# Altium PCB SPTSquidBoardRev0.PcbDoc (part 2 of 2)
Units mil, origin at the board's own origin, x right, y up, seen from the top; angles counter-clockwise.
Board outline 7119.46 x 1780.03 mil, 6 copper layers (Top Layer, Internal Plane 1, Mid-Layer 1, Mid-Layer 2, Internal Plane 2, Bottom Layer), stack 48.451 mil thick; 66 components, 109 nets, 344 pads, 93 vias.
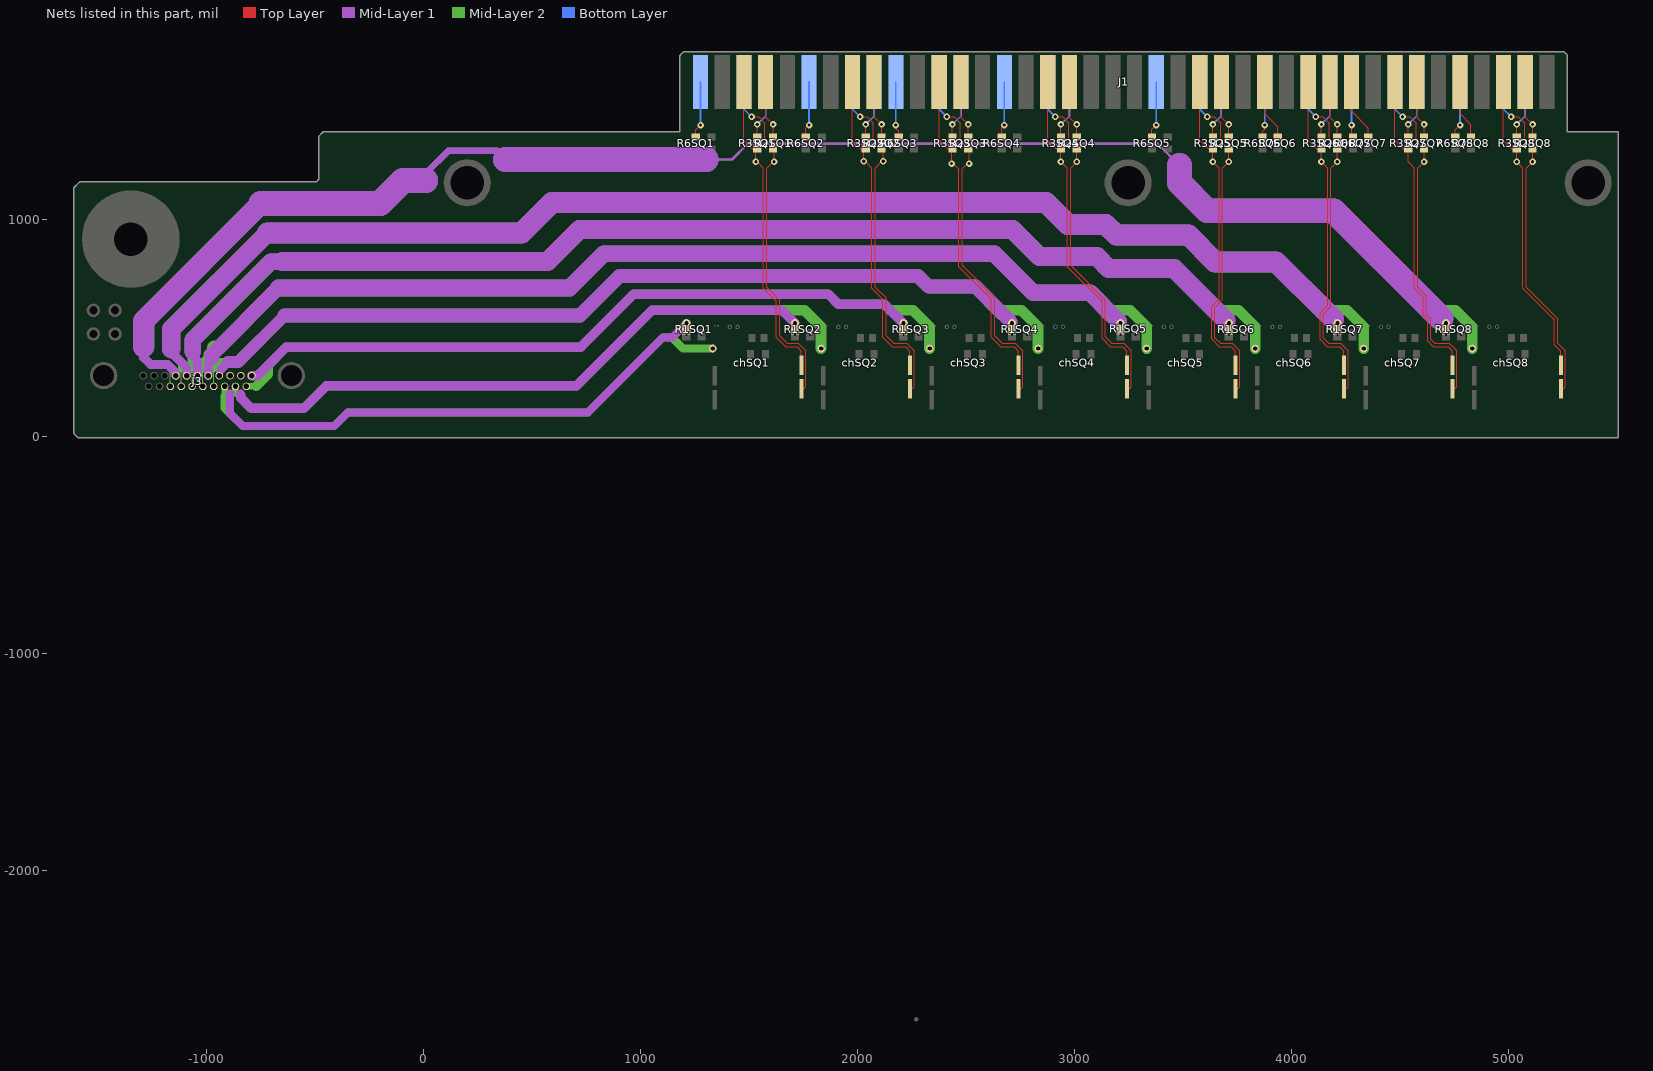
[diagram p6: the nets of this part, all layers, seen from the top]

## Via types
v1: diameter 30, hole 15, Top Layer to Bottom Layer, 93 vias

## Nets (pads, with @x,y where several pads share a name; then routed paths per layer and width w, separated by ;. In a path a pad name is that pad's centre, name@x,y a point inside that pad or via, vN(x,y) a via of type N, cw(c..) or ccw(c..) an arc to the next point about the centre after c; other vN are vias at no path point) (continued)
NULL_N6: J1.14B R7SQ6.1 | length 278.7
  Top Layer w5: J1.14B@3875,1635 3875,1488.93 3934.72,1429.21 R7SQ6.1@3934.72,1381
NULL_N7: J1.10B R7SQ7.1 | length 285.7
  Top Layer w5: J1.10B@4275,1635 4275,1499.02 4351.55,1422.47 R7SQ7.1@4351.55,1381
NULL_N8: J1.5B R7SQ8.1 | length 274.7
  Top Layer w5: J1.5B@4775,1635 4775,1488.26 4824.94,1438.31 R7SQ8.1@4824.94,1381
NULL_P1: J1.40A R6SQ1.1 | length 263.4
  Top Layer w5: R6SQ1.1@1253.22,1381 1253.22,1414.22 v1(1275,1436) v1@1275.35,1436
  Bottom Layer w8: v1(1275,1436) J1.40A@1275,1635
NULL_P2: J1.35A R6SQ2.1 | length 260.7
  Top Layer w5: R6SQ2.1@1759.55,1381 1759.55,1420.55 v1(1775,1436) v1@1775.35,1436
  Bottom Layer w8: v1(1775,1436) J1.35A@1775,1635
NULL_P3: J1.31A R6SQ3.1 | length 259.5
  Top Layer w5: v1(2175,1436) 2175,1421.35 2188.2,1408.15 R6SQ3.1@2188.2,1381
  Bottom Layer w8: v1(2175,1436) J1.31A@2175,1635
NULL_P4: J1.26A R6SQ4.1 | length 259.2
  Top Layer w5: R6SQ4.1@2662.49,1381 2662.49,1423.49 v1(2675,1436)
  Bottom Layer w8: v1(2675,1436) J1.26A@2675,1635
NULL_P5: J1.19A R6SQ5.1 | length 262.3
  Top Layer w5: R6SQ5.1@3355.02,1381 3355.02,1416.02 v1(3375,1436)
  Bottom Layer w8: v1(3375,1436) J1.19A@3375,1635
NULL_P6: J1.14A R6SQ6.1 | length 258.2
  Top Layer w5: R6SQ6.1@3864.84,1381 3864.84,1407.47 3875,1417.63 v1(3875,1436)
  Bottom Layer w8: v1(3875,1436) J1.14A@3875,1635
NULL_P7: J1.10A R6SQ7.1 | length 256.7
  Top Layer w5: v1(4275,1436) 4275,1387.48 R6SQ7.1@4281.48,1381
  Bottom Layer w8: v1(4275,1436) J1.10A@4275,1635
NULL_P8: J1.5A R6SQ8.1 | length 263
  Top Layer w5: R6SQ8.1@4753.16,1381 4753.16,1414.16 v1(4775,1436)
  Bottom Layer w8: v1(4775,1436) J1.5A@4775,1635
SQ_IV_N1: J1.37A R3SQ1.1 | length 270.2
  Top Layer w5: R3SQ1.1@1536,1381 v1(1536,1439)
  Bottom Layer w8: v1(1536,1439) 1575,1478 J1.37A@1575,1635
SQ_IV_N2: J1.32A R3SQ2.1 | length 270.2
  Top Layer w5: R3SQ2.1@2036,1381 v1(2036,1439)
  Bottom Layer w8: v1(2036,1439) 2075,1478 J1.32A@2075,1635
SQ_IV_N3: J1.28A R3SQ3.1 | length 270.2
  Top Layer w5: R3SQ3.1@2436,1381 v1(2436,1439)
  Bottom Layer w8: v1(2436,1439) 2475,1478 J1.28A@2475,1635
SQ_IV_N4: J1.23A R3SQ4.1 | length 270.2
  Top Layer w5: R3SQ4.1@2936,1381 v1(2936,1439)
  Bottom Layer w8: v1(2936,1439) 2975,1478 J1.23A@2975,1635
SQ_IV_N5: J1.16A R3SQ5.1 | length 270.2
  Top Layer w5: R3SQ5.1@3636,1381 v1(3636,1439)
  Bottom Layer w8: v1(3636,1439) 3675,1478 J1.16A@3675,1635
SQ_IV_N6: J1.11A R3SQ6.1 | length 270.2
  Top Layer w5: R3SQ6.1@4136,1381 v1(4136,1439)
  Bottom Layer w8: v1(4136,1439) 4175,1478 J1.11A@4175,1635
SQ_IV_N7: J1.7A R3SQ7.1 | length 270.2
  Top Layer w5: R3SQ7.1@4536,1381 v1(4536,1439)
  Bottom Layer w8: v1(4536,1439) 4575,1478 J1.7A@4575,1635
SQ_IV_N8: J1.2A R3SQ8.1 | length 270.2
  Top Layer w5: R3SQ8.1@5036,1381 v1(5036,1439)
  Bottom Layer w8: v1(5036,1439) 5075,1478 J1.2A@5075,1635
SQ_IV_P1: J1.37B R2SQ1.2 | length 268.1
  Top Layer w5: J1.37B@1575,1635 1575,1473 v1(1609,1439) R2SQ1.2@1609,1381
SQ_IV_P2: J1.32B R2SQ2.2 | length 268.1
  Top Layer w5: J1.32B@2075,1635 2075,1473 v1(2109,1439) R2SQ2.2@2109,1381
SQ_IV_P3: J1.28B R2SQ3.2 | length 268.1
  Top Layer w5: J1.28B@2475,1635 2475,1473 v1(2509,1439) R2SQ3.2@2509,1381
SQ_IV_P4: J1.23B R2SQ4.2 | length 268.1
  Top Layer w5: J1.23B@2975,1635 2975,1473 v1(3009,1439) R2SQ4.2@3009,1381
SQ_IV_P5: J1.16B R2SQ5.2 | length 268.1
  Top Layer w5: J1.16B@3675,1635 3675,1473 v1(3709,1439) R2SQ5.2@3709,1381
SQ_IV_P6: J1.11B R2SQ6.2 | length 268.1
  Top Layer w5: J1.11B@4175,1635 4175,1473 v1(4209,1439) R2SQ6.2@4209,1381
SQ_IV_P7: J1.7B R2SQ7.2 | length 268.1
  Top Layer w5: J1.7B@4575,1635 4575,1473 v1(4609,1439) R2SQ7.2@4609,1381
SQ_IV_P8: J1.2B R2SQ8.2 | length 268.1
  Top Layer w5: J1.2B@5075,1635 5075,1473 v1(5109,1439) R2SQ8.2@5109,1381
SQ_OUT_N1: chSQ1.4 J1.38B R3SQ1.2 | length 1464.7
  Top Layer w5: J1.38B@1475,1635 1475,1366 1516,1325 R3SQ1.2@1536,1325 1530.23,1319.23 v1(1530.23,1266.76) 1536.24,1266.76 1565,1238 1565,683.21 1625,623.21 1625,458.79 1668.79,415 1719.79,415 1740,394.79 chSQ1.4@1740,330
SQ_OUT_N2: chSQ2.4 J1.33B R3SQ2.2 | length 1473.4
  Top Layer w5: J1.33B@1975,1635 1975,1366 2016,1325 R3SQ2.2@2036,1325 2027,1316 v1(2027,1269.63) 2033.37,1269.63 2065,1238 2065,683.21 2115,633.21 2115,458.79 2158.79,415 2219.79,415 2240,394.79 chSQ2.4@2240,330
SQ_OUT_N3: chSQ3.4 J1.29B R3SQ3.2 | length 1528.1
  Top Layer w5: J1.29B@2375,1635 2375,1366 2416,1325 R3SQ3.2@2436,1325 ; R3SQ3.2@2424.22,1313.22 R3SQ3.2@2436,1325 ; chSQ3.4@2740,330 2740,394.79 2719.79,415 2658.79,415 2614.74,459.05 2614.74,633.48 2465,783.21 2465,1233.19 2439.53,1258.66 v1(2431.94,1258.66) 2431.94,1320.94 R3SQ3.2@2436,1325
SQ_OUT_N4: chSQ4.4 J1.24B R3SQ4.2 | length 1500.7
  Top Layer w5: J1.24B@2875,1635 2875,1366 2916,1325 R3SQ4.2@2936,1325 v1(2936,1267) 2965,1238 2965,783.21 3125,623.21 3125,453.79 3163.79,415 3219.79,415 3240,394.79 chSQ4.4@3240,330
SQ_OUT_N5: chSQ5.4 J1.17B R3SQ5.2 | length 1445.7
  Top Layer w5: J1.17B@3575,1635 3575,1366 3616,1325 R3SQ5.2@3636,1325 v1(3636,1267) 3665,1238 3665,636.21 3630,601.21 3630,450.7 3665.7,415 3719.79,415 3740,394.79 chSQ5.4@3740,330
SQ_OUT_N6: chSQ6.4 J1.12B R3SQ6.2 | length 1446.9
  Top Layer w5: J1.12B@4075,1635 4075,1366 4116,1325 R3SQ6.2@4136,1325 v1(4136,1267) 4165,1238 4165,606.21 4130,571.21 4130,448.79 4163.79,415 4219.79,415 4240,394.79 chSQ6.4@4240,330
SQ_OUT_N7: chSQ7.4 J1.8B R3SQ7.2 | length 1465.9
  Top Layer w5: J1.8B@4475,1635 4475,1366 4516,1325 R3SQ7.2@4536,1325 4536,1267 4565,1238 4565,683.21 4605,643.21 4605,558.79 4625,538.79 4625,442.57 4652.57,415 4719.79,415 4740,394.79 chSQ7.4@4740,330
SQ_OUT_N8: chSQ8.4 J1.3B R3SQ8.2 | length 1426.5
  Top Layer w5: J1.3B@4975,1635 4975,1366 5016,1325 R3SQ8.2@5036,1325 v1(5036,1267) 5065,1238 5065,683.21 5210,538.21 5210,424.79 5240,394.79 chSQ8.4@5240,330
SQ_OUT_P1: chSQ1.3 J1.38A R2SQ1.1 | length 1627.3
  Top Layer w5: v1(1510,1474) 1543,1474 1572,1445 1572,1362 R2SQ1.1@1609,1325 1614.06,1319.94 v1(1614.06,1267.48) 1609.48,1267.48 1580,1238 1580,689.43 1640,629.43 1640,465 1675,430 1726,430 1760,396 1760,230 1750,220 chSQ1.3@1740,220
  Bottom Layer w8: J1.38A@1475,1635 1475,1509 v1(1510,1474)
SQ_OUT_P2: chSQ2.3 J1.33A R2SQ2.1 | length 1636.9
  Top Layer w5: v1(2010,1474) 2043,1474 2072,1445 2072,1362 R2SQ2.1@2109,1325 2117.22,1316.78 v1(2117.22,1268.75) 2110.75,1268.75 2080,1238 2080,689.43 2130,639.43 2130,465 2165,430 2226,430 2260,396 2260,230 2250,220 chSQ2.3@2240,220
  Bottom Layer w8: J1.33A@1975,1635 1975,1509 v1(2010,1474)
SQ_OUT_P3: chSQ3.3 J1.29A R2SQ3.1 | length 1692.5
  Top Layer w5: v1(2410,1474) 2443,1474 2472,1445 2472,1362 R2SQ3.1@2509,1325 ; R2SQ3.1@2520.98,1313.02 R2SQ3.1@2509,1325 ; chSQ3.3@2740,220 2750,220 2760,230 2760,396 2726,430 2665,430 2629.74,465.26 2629.74,639.69 2480,789.43 2480,1235.48 2503.18,1258.66 v1(2512.16,1258.66) 2512.16,1321.84 R2SQ3.1@2509,1325
  Bottom Layer w8: J1.29A@2375,1635 2375,1509 v1(2410,1474)
SQ_OUT_P4: chSQ4.3 J1.24A R2SQ4.1 | length 1664.8
  Top Layer w5: v1(2910,1474) 2943,1474 2972,1445 2972,1362 R2SQ4.1@3009,1325 v1(3009,1267) 2980,1238 2980,789.43 3140,629.43 3140,460 3170,430 3226,430 3260,396 3260,230 3250,220 chSQ4.3@3240,220
  Bottom Layer w8: J1.24A@2875,1635 2875,1509 v1(2910,1474)
SQ_OUT_P5: chSQ5.3 J1.17A R2SQ5.1 | length 1609.8
  Top Layer w5: v1(3610,1474) 3643,1474 3672,1445 3672,1362 R2SQ5.1@3709,1325 v1(3709,1267) 3680,1238 3680,630 3645,595 3645,456.91 3671.91,430 3726,430 3760,396 3760,230 3750,220 chSQ5.3@3740,220
  Bottom Layer w8: J1.17A@3575,1635 3575,1509 v1(3610,1474)
SQ_OUT_P6: chSQ6.3 J1.12A R2SQ6.1 | length 1610.9
  Top Layer w5: v1(4110,1474) 4143,1474 4172,1445 4172,1362 R2SQ6.1@4209,1325 v1(4209,1267) 4180,1238 4180,600 4145,565 4145,455 4170,430 4226,430 4260,396 4260,230 4250,220 chSQ6.3@4240,220
  Bottom Layer w8: J1.12A@4075,1635 4075,1509 v1(4110,1474)
SQ_OUT_P7: chSQ7.3 J1.8A R2SQ7.1 | length 1629.9
  Top Layer w5: v1(4510,1474) 4543,1474 4572,1445 4572,1362 R2SQ7.1@4609,1325 v1(4609,1267) 4580,1238 4580,689.43 4620,649.43 4620,565 4640,545 4640,448.79 4658.79,430 4726,430 4760,396 4760,230 4750,220 chSQ7.3@4740,220
  Bottom Layer w8: J1.8A@4475,1635 4475,1509 v1(4510,1474)
SQ_OUT_P8: chSQ8.3 J1.3A R2SQ8.1 | length 1590.5
  Top Layer w5: v1(5010,1474) 5043,1474 5072,1445 5072,1362 R2SQ8.1@5109,1325 v1(5109,1267) 5080,1238 5080,689.43 5225,544.43 5225,431 5260,396 5260,230 5250,220 chSQ8.3@5240,220
  Bottom Layer w8: J1.3A@4975,1635 4975,1509 v1(5010,1474)
WIRE_N1: J3.9 R1SQ1.2B | length 2412.5
  Mid-Layer 1 w37: -893.13,190.25 -893.13,107.65 -834.55,49.06 -413.27,49.06 -350.78,111.56 755.39,111.56 1101.05,457.21 1144.94,457.21 R1SQ1.2B@1209.92,522.19
  Mid-Layer 1 w40: -893.13,190.25 -893.13,196.9
WIRE_N2: J3.10 R1SQ2.2B | length 2804
  Mid-Layer 1 w40: -843.13,190.25 -843.13,196.9
  Mid-Layer 1 w43: -843.13,190.25 -843.13,178.53 -795.14,130.54 -553.26,130.54 -448.89,234.9 703.2,234.9 1051.18,582.88 1649.99,582.88 R1SQ2.2B@1710.3,522.57
WIRE_N3: J3.11 R1SQ3.2B | length 3214.5
  Mid-Layer 1 w43: J3.11@-793.13,281.58 -765.17,281.58 -634.96,411.79 722.37,411.79 967.68,657.09 1863.58,657.09 1911.01,609.66 2122.46,609.66 R1SQ3.2B@2209.92,522.19
WIRE_N4: J3.8 R1SQ4.2B | length 3939.2
  Mid-Layer 1 w30: J3.8@-943.13,281.58 -943.13,300.05 -934.06,309.12
  Mid-Layer 1 w40: -934.06,309.12 -934.06,311.94 -902.25,343.75
  Mid-Layer 1 w54: -902.25,343.75 -856.2,343.75 -642.23,557.72
  Mid-Layer 1 w64: -642.57,557.72 718.88,557.72 902.41,741.25 2276.67,741.25 2326.45,691.47 2541.4,691.47 R1SQ4.2B@2704.61,528.26
WIRE_N5: J3.7 R1SQ5.2B | length 4603.1
  Mid-Layer 1 w40: J3.7@-993.13,281.58 -993.13,333.43 -978.01,348.54 -978.01,361.66
  Mid-Layer 1 w67: -978.01,361.66 -978.01,377.91 -670.29,685.63
  Mid-Layer 1 w77: -670.29,685.63 671.79,685.63 828.58,842.43 2629.46,842.43 2808.05,663.84 3069.37,663.84 R1SQ5.2B@3201.39,531.83
WIRE_N6: J3.6 R1SQ6.2B | length 5318.6
  Mid-Layer 1 w40: -1065.33,392.56 -1065.33,371.99 -1043.13,349.79 J3.6@-1043.13,281.58
  Mid-Layer 1 w76: -1065.33,392.56 -1065.33,446.57 -705.76,806.14 -652.54,806.14
  Mid-Layer 1 w87: -651.23,807.45 570.14,807.45 718.29,955.6 2711.99,955.6 2838.04,829.55 3102.15,829.55 3157.13,774.57 3457.54,774.57 3696.24,535.87
WIRE_N7: J3.5 R1SQ7.2B | length 6063.3
  Mid-Layer 1 w40: -1163.83,404.58 -1163.83,389.32 -1093.13,318.62 J3.5@-1093.13,281.58
  Mid-Layer 1 w84: -1163.83,404.58 -1163.83,496.29 -720.78,939.35
  Mid-Layer 1 w97: -720.78,939.35 450.3,939.35 590.72,1079.77 2866.93,1079.77 2967.91,978.8 3141.35,978.8 3191.25,928.9 3522.52,928.9 3645.51,805.9 3926.21,805.9 4191.43,541.99
WIRE_N8: J3.4 R1SQ8.2B | length 7110.1
  Mid-Layer 1 w10: 1300.71,1277.01 1419.68,1277.01 1492.43,1349.77 3382.19,1349.77 3481.87,1250.09
  Mid-Layer 1 w30: 9.24,1180.73 9.24,1214.08 113.35,1318.19 334.95,1318.19 376.13,1277.01
  Mid-Layer 1 w40: -1291.93,415.22 -1291.93,365.2 -1259.26,332.53 -1180.31,332.53 -1143.13,295.34 J3.4@-1143.13,281.58
  Mid-Layer 1 w99: -1291.93,415.22 -1291.93,532.74 -750.27,1074.4
  Mid-Layer 1 w114: -750.27,1074.4 -202.37,1074.4 -96.04,1180.73 9.24,1180.73 ; 376.13,1277.01 1300.71,1277.01 ; 3481.87,1250.09 3481.87,1169.79 3610.44,1041.22 4191.65,1041.22 4687.04,545.83
WIRE_P1: chSQ1.1B J3.19 | length 2572.4
  Mid-Layer 2 w30: -918.13,188.36 J3.19@-918.13,231.58
  Mid-Layer 2 w37: -918.13,188.36 -918.13,132.96 -834.23,49.06 -413.27,49.06 -350.78,111.56 755.39,111.56 1101.05,457.21 1144.17,457.21 1194.88,406.5 chSQ1.1B@1330.85,406.5
WIRE_P2: chSQ2.1B J3.20 | length 3075.7
  Mid-Layer 2 w30: J3.20@-868.13,231.58 -868.13,203.83 -843.92,179.61
  Mid-Layer 2 w43: -843.92,179.61 -794.84,130.54 -553.26,130.54 -448.89,234.9 703.2,234.9 1051.18,582.88 1649.99,582.88
  Mid-Layer 2 w50: 1649.99,582.88 1753.82,582.88 1830.85,505.85 chSQ2.1B@1830.85,406.5
WIRE_P3: chSQ3.1B J3.21 | length 3511.5
  Mid-Layer 2 w30: J3.21@-818.13,231.58 -773.08,231.58
  Mid-Layer 2 w43: -773.08,231.58 -716.02,288.64 -716.02,330.54 -634.77,411.79 722.37,411.79 967.68,657.09 1863.58,657.09 1911.01,609.66 2122.46,609.66 2149.61,582.5
  Mid-Layer 2 w50: 2149.99,582.88 2253.82,582.88 2330.85,505.85 chSQ3.1B@2330.85,406.5
WIRE_P4: chSQ4.1B J3.18 | length 4281
  Mid-Layer 2 w5: J3.18@-968.13,231.58 -968.13,309.96
  Mid-Layer 2 w30: -968.13,309.96 -968.13,322.65 -947.97,342.81
  Mid-Layer 2 w40: -947.97,342.81 -857.14,342.81
  Mid-Layer 2 w50: 2649.99,582.88 2753.82,582.88 2830.85,505.85 chSQ4.1B@2830.85,406.5
  Mid-Layer 2 w54: -857.14,342.81 -642.23,557.72
  Mid-Layer 2 w64: -642.23,557.72 718.88,557.72 902.41,741.25 2276.67,741.25 2326.45,691.47 2541.4,691.47 2664.65,568.22
WIRE_P5: chSQ5.1B J3.17 | length 4928.8
  Mid-Layer 2 w5: J3.17@-1018.13,231.58 -1018.13,309.96
  Mid-Layer 2 w30: -1018.13,309.96 -1018.13,340.4
  Mid-Layer 2 w40: -1018.13,340.4 -995.92,362.61 -995.92,379.68 -965.12,410.48
  Mid-Layer 2 w50: 3149.99,582.88 3253.82,582.88 3330.85,505.85 chSQ5.1B@3330.85,406.5
  Mid-Layer 2 w67: -965.12,410.48 -945.45,410.48 -670.3,685.63
  Mid-Layer 2 w77: -670.3,685.63 671.79,685.63 828.58,842.43 2629.46,842.43 2808.05,663.84 3069.37,663.84 3160.19,573.02
WIRE_P6: chSQ6.1B J3.16 | length 5613.8
  Mid-Layer 2 w5: J3.16@-1068.13,231.58 -1068.13,309.96
  Mid-Layer 2 w40: -1068.13,316.26 -1068.13,390.56 -1065.72,392.97
  Mid-Layer 2 w50: 3649.99,582.88 3753.82,582.88 3830.85,505.85 chSQ6.1B@3830.85,406.5
  Mid-Layer 2 w76: -1065.72,392.97 -1065.72,446.19 -704.74,807.16 -650.17,807.16
  Mid-Layer 2 w87: -650.17,807.16 -649.89,807.45 570.14,807.45 718.29,955.6 2711.99,955.6 2838.04,829.55 3102.15,829.55 3157.13,774.57 3457.54,774.57 3657.74,574.37
WIRE_P7: chSQ7.1B J3.15 | length 6373
  Mid-Layer 2 w5: J3.15@-1118.13,231.58 -1118.13,309.96
  Mid-Layer 2 w30: -1118.13,309.96 -1118.13,342.37
  Mid-Layer 2 w40: -1164.99,379.51 -1164.99,389.24 ; -1164.99,405.27 -1164.99,389.24 ; -1118.13,342.37 -1164.99,389.24
  Mid-Layer 2 w50: 4149.99,582.88 4253.82,582.88 4330.85,505.85 chSQ7.1B@4330.85,406.5
  Mid-Layer 2 w84: -1164.99,405.27 -1164.99,495.13 -720.78,939.35
  Mid-Layer 2 w97: -720.78,939.35 450.3,939.35 590.72,1079.77 2866.93,1079.77 2967.91,978.8 3141.35,978.8 3191.25,928.9 3522.52,928.9 3645.51,805.9 3926.21,805.9 4154.06,579.18
WIRE_P8: chSQ8.1B J3.14 | length 7400.4
  Mid-Layer 2 w5: J3.14@-1168.13,231.58 -1168.13,309.96
  Mid-Layer 2 w10: 1300.71,1277.01 1419.68,1277.01 1492.43,1349.77 3382.19,1349.77 3481.87,1250.09
  Mid-Layer 2 w30: -1184.25,332.38 -1168.13,316.26 -1168.13,309.96 ; 9.24,1180.73 9.24,1214.08 113.35,1318.19 334.95,1318.19 376.13,1277.01
  Mid-Layer 2 w40: -1291.69,415.67 -1291.69,366.53 -1257.54,332.38 -1184.25,332.38
  Mid-Layer 2 w50: 4649.99,582.88 4753.82,582.88 4830.85,505.85 chSQ8.1B@4830.85,406.5
  Mid-Layer 2 w99: -1291.69,415.67 -1291.69,532.97 -750.27,1074.4
  Mid-Layer 2 w114: -750.27,1074.4 -202.37,1074.4 -96.04,1180.73 9.24,1180.73 ; 376.13,1277.01 1300.71,1277.01 ; 3481.87,1250.09 3481.87,1169.79 3610.44,1041.22 4191.65,1041.22 4646.05,586.82
pads on no net: chSQ1.1 chSQ1.2 chSQ2.1 chSQ2.2 chSQ3.1 chSQ3.2 chSQ4.1 chSQ4.2 chSQ5.1 chSQ5.2 chSQ6.1 chSQ6.2 chSQ7.1 chSQ7.2 chSQ8.1 chSQ8.2 J1.1A J1.20A J1.20B J1.21A J1.21B J1.22A J3.1 J3.2 J3.3 J3.12 J3.13

## Polygon pours and split planes (outlines as drawn)
WIRE_P4 on Mid-Layer 2 "Top Layer-No Net" (solid, pour order 16): -980.26,304.52 -980.1,304.37 -980.1,249.94 -980.1,243.56 -968.13,231.58 -955.56,244.15 -955.56,291.72 -955.56,304.52
WIRE_P5 on Mid-Layer 2 "Top Layer-No Net" (solid, pour order 18): -1030.26,304.52 -1030.1,304.37 -1030.1,249.94 -1030.1,243.56 -1018.13,231.58 -1005.56,244.15 -1005.56,291.72 -1005.56,304.52
WIRE_P6 on Mid-Layer 2 "Top Layer-No Net" (solid, pour order 22): -1080.26,304.52 -1080.1,304.37 -1080.1,249.94 -1080.1,243.56 -1068.13,231.58 -1055.56,244.15 -1055.56,291.72 -1055.56,304.52
WIRE_P8 on Mid-Layer 2 "Top Layer-No Net" (solid, remove dead copper, pour order 20): 1276.89,1219.92 1393.06,1219.92 1437.54,1219.92 1489.72,1272.09 1509.98,1292.36 1634.29,1292.23 1634.29,1288.47 1655.28,1267.48 1657.43,1269.63 1985.78,1269.63 1985.78,1278.89 2000.52,1293.63 2084.8,1293.63 2127.52,1293.63 2157.73,1263.42 2162.49,1258.66 2390.72,1258.66 2390.72,1274.74 2407.06,1291.08 2410.34,1294.35 2511.65,1294.35 2552.68,1253.33 2555.68,1256.33 2896.19,1256.33 2896.19,1271.86 2916.56,1292.23 2917.96,1293.63 3012,1293.63 3023.59,1293.63 3050.22,1267 3081.11,1236.11 3271.04,1236.11 3370.5,1136.65 3418.81,1088.34 3531.05,1088.34 3531.05,1276.6 3468.54,1339.11 3413,1394.65 3399.63,1394.65 1345.69,1394.65 1278.38,1332.72
WIRE_P8 on Mid-Layer 2 "Top Layer-No Net" (solid, remove dead copper, pour order 13): 196.35,1018.9 284.77,1018.9 ccw(c231.8,1213.28) 387.96,1085.99 447.81,1220.8 447.81,1333.45 312.66,1333.45 109.74,1333.45 45.37,1333.45 ccw(c45.37,1302.38) 23.4,1324.35 -62.57,1238.38 -62.57,1123.51 -47.91,1106.38 -36.84,1095.32 ccw(c147.65,1279.82) 147.65,1018.9
WIRE_P8 on Mid-Layer 2 "Top Layer-No Net" (solid, pour order 21): -1180.26,304.52 -1180.1,304.37 -1180.1,249.94 -1180.1,243.56 -1168.13,231.58 -1155.56,244.15 -1155.56,291.72 -1155.56,304.52
WIRE_P7 on Mid-Layer 2 "Top Layer-No Net" (solid, pour order 17): -1130.26,304.52 -1130.1,304.37 -1130.1,249.94 -1130.1,243.56 -1118.13,231.58 -1105.56,244.15 -1105.56,291.72 -1105.56,304.52
WIRE_N8 on Mid-Layer 1 "Top Layer-No Net" (solid, remove dead copper, pour order 19): 1276.89,1219.92 1393.06,1219.92 1437.54,1219.92 1489.72,1272.09 1509.98,1292.36 1634.29,1292.23 1634.29,1288.47 1655.28,1267.48 1657.43,1269.63 1985.78,1269.63 1985.78,1278.89 2000.52,1293.63 2084.8,1293.63 2127.52,1293.63 2157.73,1263.42 2162.49,1258.66 2390.72,1258.66 2390.72,1274.74 2407.06,1291.08 2410.34,1294.35 2511.65,1294.35 2552.68,1253.33 2555.68,1256.33 2896.19,1256.33 2896.19,1271.86 2916.56,1292.23 2917.96,1293.63 3012,1293.63 3023.59,1293.63 3050.22,1267 3081.11,1236.11 3271.04,1236.11 3370.5,1136.65 3418.81,1088.34 3531.05,1088.34 3531.05,1276.6 3468.54,1339.11 3413,1394.65 3399.63,1394.65 1345.69,1394.65 1278.38,1332.72
WIRE_N8 on Mid-Layer 1 "Top Layer-No Net" (solid, remove dead copper, pour order 12): 196.35,1018.9 284.77,1018.9 ccw(c231.8,1213.28) 387.96,1085.99 447.81,1220.8 447.81,1333.45 312.66,1333.45 109.74,1333.45 45.37,1333.45 ccw(c45.37,1302.38) 23.4,1324.35 -62.57,1238.38 -62.57,1123.51 -47.91,1106.38 -36.84,1095.32 ccw(c147.65,1279.82) 147.65,1018.9
WIRE_N1 on Mid-Layer 1 "Top Layer-No Net" (solid, pour order 15): -881,208.64 -881.15,208.79 -881.15,263.22 -881.15,269.6 -893.13,281.58 -905.7,269.01 -905.7,221.44 -905.7,208.64
WIRE_N2 on Mid-Layer 1 "Top Layer-No Net" (solid, pour order 14): -831,208.64 -831.15,208.79 -831.15,263.22 -831.15,269.6 -843.13,281.58 -855.7,269.01 -855.7,221.44 -855.7,208.64
no net on Top Solder "Top Layer-No Net" (solid): 1185,1505 1185,1755 1200,1770 5250,1770 5265,1755 5265,1505
no net on Bottom Solder "Top Layer-No Net" (solid): 1185,1505 1185,1755 1200,1770 5250,1770 5265,1755 5265,1505
no net on Mechanical 3 "Top Layer-No Net" (solid): 1185,1505 1185,1755 1200,1770 5250,1770 5265,1755 5265,1505
GND_POWER on Internal Plane 1 (split plane): 5249.92,1748.75 5249.92,1405.02 5250.3,1401.09 5251.45,1397.32 5253.31,1393.85 5255.8,1390.8 5258.85,1388.31 5262.32,1386.45 5266.09,1385.3 5270.02,1384.92 5484.92,1384.92 5484.92,15.08 -1585.46,15.08 -1594.34,23.96 -1594.34,1137.15 -1576.57,1154.92 -495.35,1154.92 -491.43,1155.3 -487.66,1156.45 -484.18,1158.3 -481.14,1160.8 -470.2,1171.74 -467.7,1174.78 -465.84,1178.26 -464.7,1182.03 -464.31,1185.95 -464.31,1376.45 -456.15,1384.61 878.27,1384.61 880,1384.78 880,1383.67 883.01,1384.92 1179.98,1384.92 1183.91,1385.3 1187.68,1386.45 1191.15,1388.31 1194.2,1390.8 1196.69,1393.85 1198.55,1397.32 1199.7,1401.09 1200.08,1405.02 1200.08,1748.75 1206.25,1754.92 5243.75,1754.92
GND_POWER on Internal Plane 2 (split plane): 5249.92,1748.75 5249.92,1405.02 5250.3,1401.09 5251.45,1397.32 5253.31,1393.85 5255.8,1390.8 5258.85,1388.31 5262.32,1386.45 5266.09,1385.3 5270.02,1384.92 5484.92,1384.92 5484.92,15.08 -1585.46,15.08 -1594.34,23.96 -1594.34,1137.15 -1576.57,1154.92 -495.35,1154.92 -491.43,1155.3 -487.66,1156.45 -484.18,1158.3 -481.14,1160.8 -470.2,1171.74 -467.7,1174.78 -465.84,1178.26 -464.7,1182.03 -464.31,1185.95 -464.31,1376.45 -456.15,1384.61 878.27,1384.61 880,1384.78 880,1383.67 883.01,1384.92 1179.98,1384.92 1183.91,1385.3 1187.68,1386.45 1191.15,1388.31 1194.2,1390.8 1196.69,1393.85 1198.55,1397.32 1199.7,1401.09 1200.08,1405.02 1200.08,1748.75 1206.25,1754.92 5243.75,1754.92

## Keep-outs
Keep-Out Layer:
  circle w1: c200,1170 r124
  circle w1: c3245,1170 r124
  lines w10: -1609.43,17.72 -1609.43,1143.39 -1582.82,1170 -740.72,1170 -493.27,1170 -479.39,1183.87 -479.39,1382.7 -462.4,1399.69 879.69,1399.69 880,1400 1185,1400 1185,1755 1200,1770 5250,1770 5265,1755 5265,1400 5500,1400 5500,0 -1564.84,0 -1591.71,0 -1609.43,17.72

## Other copper
Top Layer:
  text "Top" at 2515,3094 h60
Mid-Layer 1:
  pour cut-out: 1489.37,1266.76 ccw(c1530.23,1266.76) 1530.23,1225.89 ccw(c1530.23,1266.76) 1571.1,1266.76 ccw(c1530.23,1266.76) 1530.23,1307.62 ccw(c1530.23,1266.76)
  pour cut-out: 1573.2,1267.48 ccw(c1614.06,1267.48) 1614.06,1226.62 ccw(c1614.06,1267.48) 1654.93,1267.48 ccw(c1614.06,1267.48) 1614.06,1308.34 ccw(c1614.06,1267.48)
  pour cut-out: 1986.14,1269.63 ccw(c2027,1269.63) 2027,1228.76 ccw(c2027,1269.63) 2067.86,1269.63 ccw(c2027,1269.63) 2027,1310.49 ccw(c2027,1269.63)
  pour cut-out: 2076.35,1268.75 ccw(c2117.22,1268.75) 2117.22,1227.89 ccw(c2117.22,1268.75) 2158.08,1268.75 ccw(c2117.22,1268.75) 2117.22,1309.62 ccw(c2117.22,1268.75)
  pour cut-out: 2391.08,1258.66 ccw(c2431.94,1258.66) 2431.94,1217.8 ccw(c2431.94,1258.66) 2472.8,1258.66 ccw(c2431.94,1258.66) 2431.94,1299.52 ccw(c2431.94,1258.66)
  pour cut-out: 2471.3,1258.66 ccw(c2512.16,1258.66) 2512.16,1217.8 ccw(c2512.16,1258.66) 2553.03,1258.66 ccw(c2512.16,1258.66) 2512.16,1299.52 ccw(c2512.16,1258.66)
  pour cut-out: 2895.14,1267 ccw(c2936,1267) 2936,1226.14 ccw(c2936,1267) 2976.86,1267 ccw(c2936,1267) 2936,1307.86 ccw(c2936,1267)
  pour cut-out: 2968.14,1267 ccw(c3009,1267) 3009,1226.14 ccw(c3009,1267) 3049.86,1267 ccw(c3009,1267) 3009,1307.86 ccw(c3009,1267)
  text "Mid1 (Signal layer)" at 2522,2695 h60
  text "Fat traces used to be STAPLE" at -1084.16,-518.3 h60
  text "Fat traces used to be STAPLE" at -1084.16,-518.3 h60
Mid-Layer 2:
  pour cut-out: 2968.14,1267 ccw(c3009,1267) 3009,1226.14 ccw(c3009,1267) 3049.86,1267 ccw(c3009,1267) 3009,1307.86 ccw(c3009,1267)
  pour cut-out: 2895.14,1267 ccw(c2936,1267) 2936,1226.14 ccw(c2936,1267) 2976.86,1267 ccw(c2936,1267) 2936,1307.86 ccw(c2936,1267)
  pour cut-out: 2471.3,1258.66 ccw(c2512.16,1258.66) 2512.16,1217.8 ccw(c2512.16,1258.66) 2553.03,1258.66 ccw(c2512.16,1258.66) 2512.16,1299.52 ccw(c2512.16,1258.66)
  pour cut-out: 2391.08,1258.66 ccw(c2431.94,1258.66) 2431.94,1217.8 ccw(c2431.94,1258.66) 2472.8,1258.66 ccw(c2431.94,1258.66) 2431.94,1299.52 ccw(c2431.94,1258.66)
  pour cut-out: 2076.35,1268.75 ccw(c2117.22,1268.75) 2117.22,1227.89 ccw(c2117.22,1268.75) 2158.08,1268.75 ccw(c2117.22,1268.75) 2117.22,1309.62 ccw(c2117.22,1268.75)
  pour cut-out: 1986.14,1269.63 ccw(c2027,1269.63) 2027,1228.76 ccw(c2027,1269.63) 2067.86,1269.63 ccw(c2027,1269.63) 2027,1310.49 ccw(c2027,1269.63)
  pour cut-out: 1573.2,1267.48 ccw(c1614.06,1267.48) 1614.06,1226.62 ccw(c1614.06,1267.48) 1654.93,1267.48 ccw(c1614.06,1267.48) 1614.06,1308.34 ccw(c1614.06,1267.48)
  pour cut-out: 1489.37,1266.76 ccw(c1530.23,1266.76) 1530.23,1225.89 ccw(c1530.23,1266.76) 1571.1,1266.76 ccw(c1530.23,1266.76) 1530.23,1307.62 ccw(c1530.23,1266.76)
  text "Mid2 (Signal Layer)" at 2513,2494 h56.25
  text "Fat traces used to be BOLO" at -1080.25,-428.3 h60
Bottom Layer:
  text "BOT" at 2514,2087 h56.25
Internal Plane 1 (plane layer: these items are gaps in the copper):
  text "GND (Plane)" at 2524,2897.6 h56.25
Internal Plane 2 (plane layer: these items are gaps in the copper):
  text "GND (Plane)" at 2514,2294.4 h56.25

## Silkscreen, mask and mechanical layers (free items; w line width, h text height)
Top Overlay:
  text "Pin22B" at 3029.19,1474.51 h20
  text "Pin1B" at 5141,1475 h20
  text "SQ1" at 1375,1230 h56.25
  text "SQ2" at 1855,1230 h56.25
  text "SQ3" at 2260,1230 h56.25
  text "SQ4" at 2760,1230 h56.25
  text "SQ5" at 3440,1230 h56.25
  text "SQ6" at 3940,1230 h56.25
  text "SQ7" at 4340,1230 h56.25
  text "SQ8" at 4840,1230 h56.25
  text "HEAT" at 1686,1171 h30 r90
  text "HEAT" at 2586,1171 h30 r90
  text "HEAT" at 3086,1171 h30 r90
  text "HEAT" at 3786,1171 h30 r90
  text "HEAT" at 4686,1171 h30 r90
  text "SIDE B" at -1022.72,806.47 h60
  text "Therm" at -1568.73,643.72 h40
  text "SQUID Mounting PCB v6" at -1343.78,608.29 h40
  text "adamjohngilbert@gmail.com" at -1344.78,548.29 h40
  text "Amy Bender" at -1344.78,479.29 h40
  text "Martin Lueker" at -1344.78,414.29 h40
  text "MicroD This Side" at -1341.37,63.44 h40
Bottom Overlay:
  text "Pin22A" at 3135.17,1476.49 h20
  text "Pin1A" at 5225.96,1476.16 h20
  text "SIDE A" at -845.66,806.47 h60
Mechanical 1:
  lines w5: 1185,1505 5265,1505
  lines w6.01: 1185,1505 1185,1755 ; 5265,1505 5265,1755
  lines w10: -730,-358.23 -730,1170 ; -730,1541.84 -730,1170 ; -480,-358.23 -480,1170 ; -480,1549.87 -480,1170 ; -462.4,1400 1185,1400 1185,1755 1200,1770 5250,1770 5265,1755 5265,1400 5500,1400 5500,0 -935,0 -975,0 -1591.55,0 -1609.11,17.56 -1609.11,1143.7 -1582.81,1170 -730,1170 ; 1185,1475 5265,1475 ; -730,1170 -730,1398.84 ; -730,1170 -480,1170 ; -730,1170 -730,1398.84 ; -730,1398.84 -731.16,1400 -730,1398.84
  text "May 19th, 2015" at 2912,3346 h56.25
  text "SQUID Mounting Board v6" at 1191,3340 h56.25
  text "Board Dimensions: 1.78\" x 7.11\"" at 1187,3263 h56.25
  text "Board Thickness: 0.059\" (including all layers + SolderMask)" at 1187,3184 h56.25
  text "Routing Layer Stackup:" at 1187,3097 h56.25
  text "Top" at 2521,3097 h56.25
  text "4mil" at 2694,3004 h56.25
  text "GND" at 2523,2900 h56.25
  text "20 - 22 mil" at 2678,2798 h56.25
  text "Mid1" at 2528,2696 h56.25
  text "2 - 3mil" at 2681,2597 h56.25
  text "Mid2" at 2511,2496 h56.25
  text "20 - 22 mil" at 2688,2399 h56.25
  text "GND" at 2512,2296 h56.25
  text "4mil" at 2685,2190 h56.25
  text "BOT" at 2512,2088 h56.25
  text "Fingered Tips (80 PLCS): Plated with Hard gold" at 1247.5,2004.98 h56.25
  text "See Mechanical 3 for Hard gold plating region (both sides of board)" at 1253.86,1904.88 h56.25
  text "Tips bevelled as per best suggestion." at 1250,1822 h56.25
  text "Edge Of Shield" at -461.62,1588.41 h60 r90
  text "Ref5F Board edge" at -711.87,1581.12 h60 r90
  text "Needed to work in" at -1748.76,1312.4 h60
  text "McGill Cryostat" at -1581.59,1222.38 h60
  text "Press-in Nut" at 4768,982 h60
  text "Press-in Nut" at -139,969 h60
  text "Press-in Nut" at 2930,960 h60
  text "450mil ThermDiam" at -1668.39,209.73 h60 r90
  text "Note: No Nickel (or any other Ferromagnetic) is to be used in fabrication." at 627,-187 h56.25
  text "The following metals are approved for processing this board:" at 636,-293 h56.25
  text "Copper, Solder, Hard Gold (tips only)." at 637,-390 h56.25
  text "0.020\"x0.090\" Bare Copper Bond pads (32 PLCS), to be protected" at 643,-567 h56.25
  text "with peelable mask (see Mech 2 layer) during HASL process" at 637,-662 h56.25
Mechanical 2:
  rectangle: 4826,232 4853,328
  rectangle: 4825.87,121.99 4852.87,217.99
  rectangle: 5226,282 5253,378
  rectangle: 5226,172 5253,268
  rectangle: 4326,232 4353,328
  rectangle: 4325.87,121.99 4352.87,217.99
  rectangle: 4726,282 4753,378
  rectangle: 4726,172 4753,268
  rectangle: 3826,232 3853,328
  rectangle: 3825.87,121.99 3852.87,217.99
  rectangle: 4226,282 4253,378
  rectangle: 4226,172 4253,268
  rectangle: 3326,232 3353,328
  rectangle: 3325.87,121.99 3352.87,217.99
  rectangle: 3726,282 3753,378
  rectangle: 3726,172 3753,268
  rectangle: 2826,232 2853,328
  rectangle: 2825.87,121.99 2852.87,217.99
  rectangle: 3226,282 3253,378
  rectangle: 3226,172 3253,268
  rectangle: 2326,232 2353,328
  rectangle: 2325.87,121.99 2352.87,217.99
  rectangle: 2726,282 2753,378
  rectangle: 2726,172 2753,268
  rectangle: 1826,232 1853,328
  rectangle: 1825.87,121.99 1852.87,217.99
  rectangle: 2226,282 2253,378
  rectangle: 2226,172 2253,268
  rectangle: 1726,172 1753,268
  rectangle: 1726,282 1753,378
  rectangle: 1325.87,121.99 1352.87,217.99
  rectangle: 1326,232 1353,328
  text "No tinning at these locations - can use peelable mask" at 1544,-117 h60
Mechanical 3:
  text "Plate this region on both sides of the board with Gold" at 1569.98,1389 h60

## Dimensions
-1609.11,1143.7 to -480,1170 on Mechanical 1
-1609.11,17.56 to 5500,0 on Mechanical 1
5500,0 to -730,-358.23 on Mechanical 1
-935,0 to 1310.87,506.78 on Mechanical 1
-730,1170 to -731.16,1400 on Mechanical 1
-730,1170 to -1609.11,1143.7 on Mechanical 1

## Text inside footprints (layer, text, board x,y; h text height)
J1: Mechanical 1 "40 POS/80 CONNECTION, EDGE BOARD" at 450,1640 h22.5